# Altium PCB PCB1.PcbDoc (part 2 of 3)
Units mm, origin at the board's own origin, x right, y up, seen from the top; angles counter-clockwise.
Board outline 150.95 x 92.76 mm, 4 copper layers (Top Layer, GND, VCC, Bottom Layer); 250 components, 258 nets, 1099 pads, 538 vias.
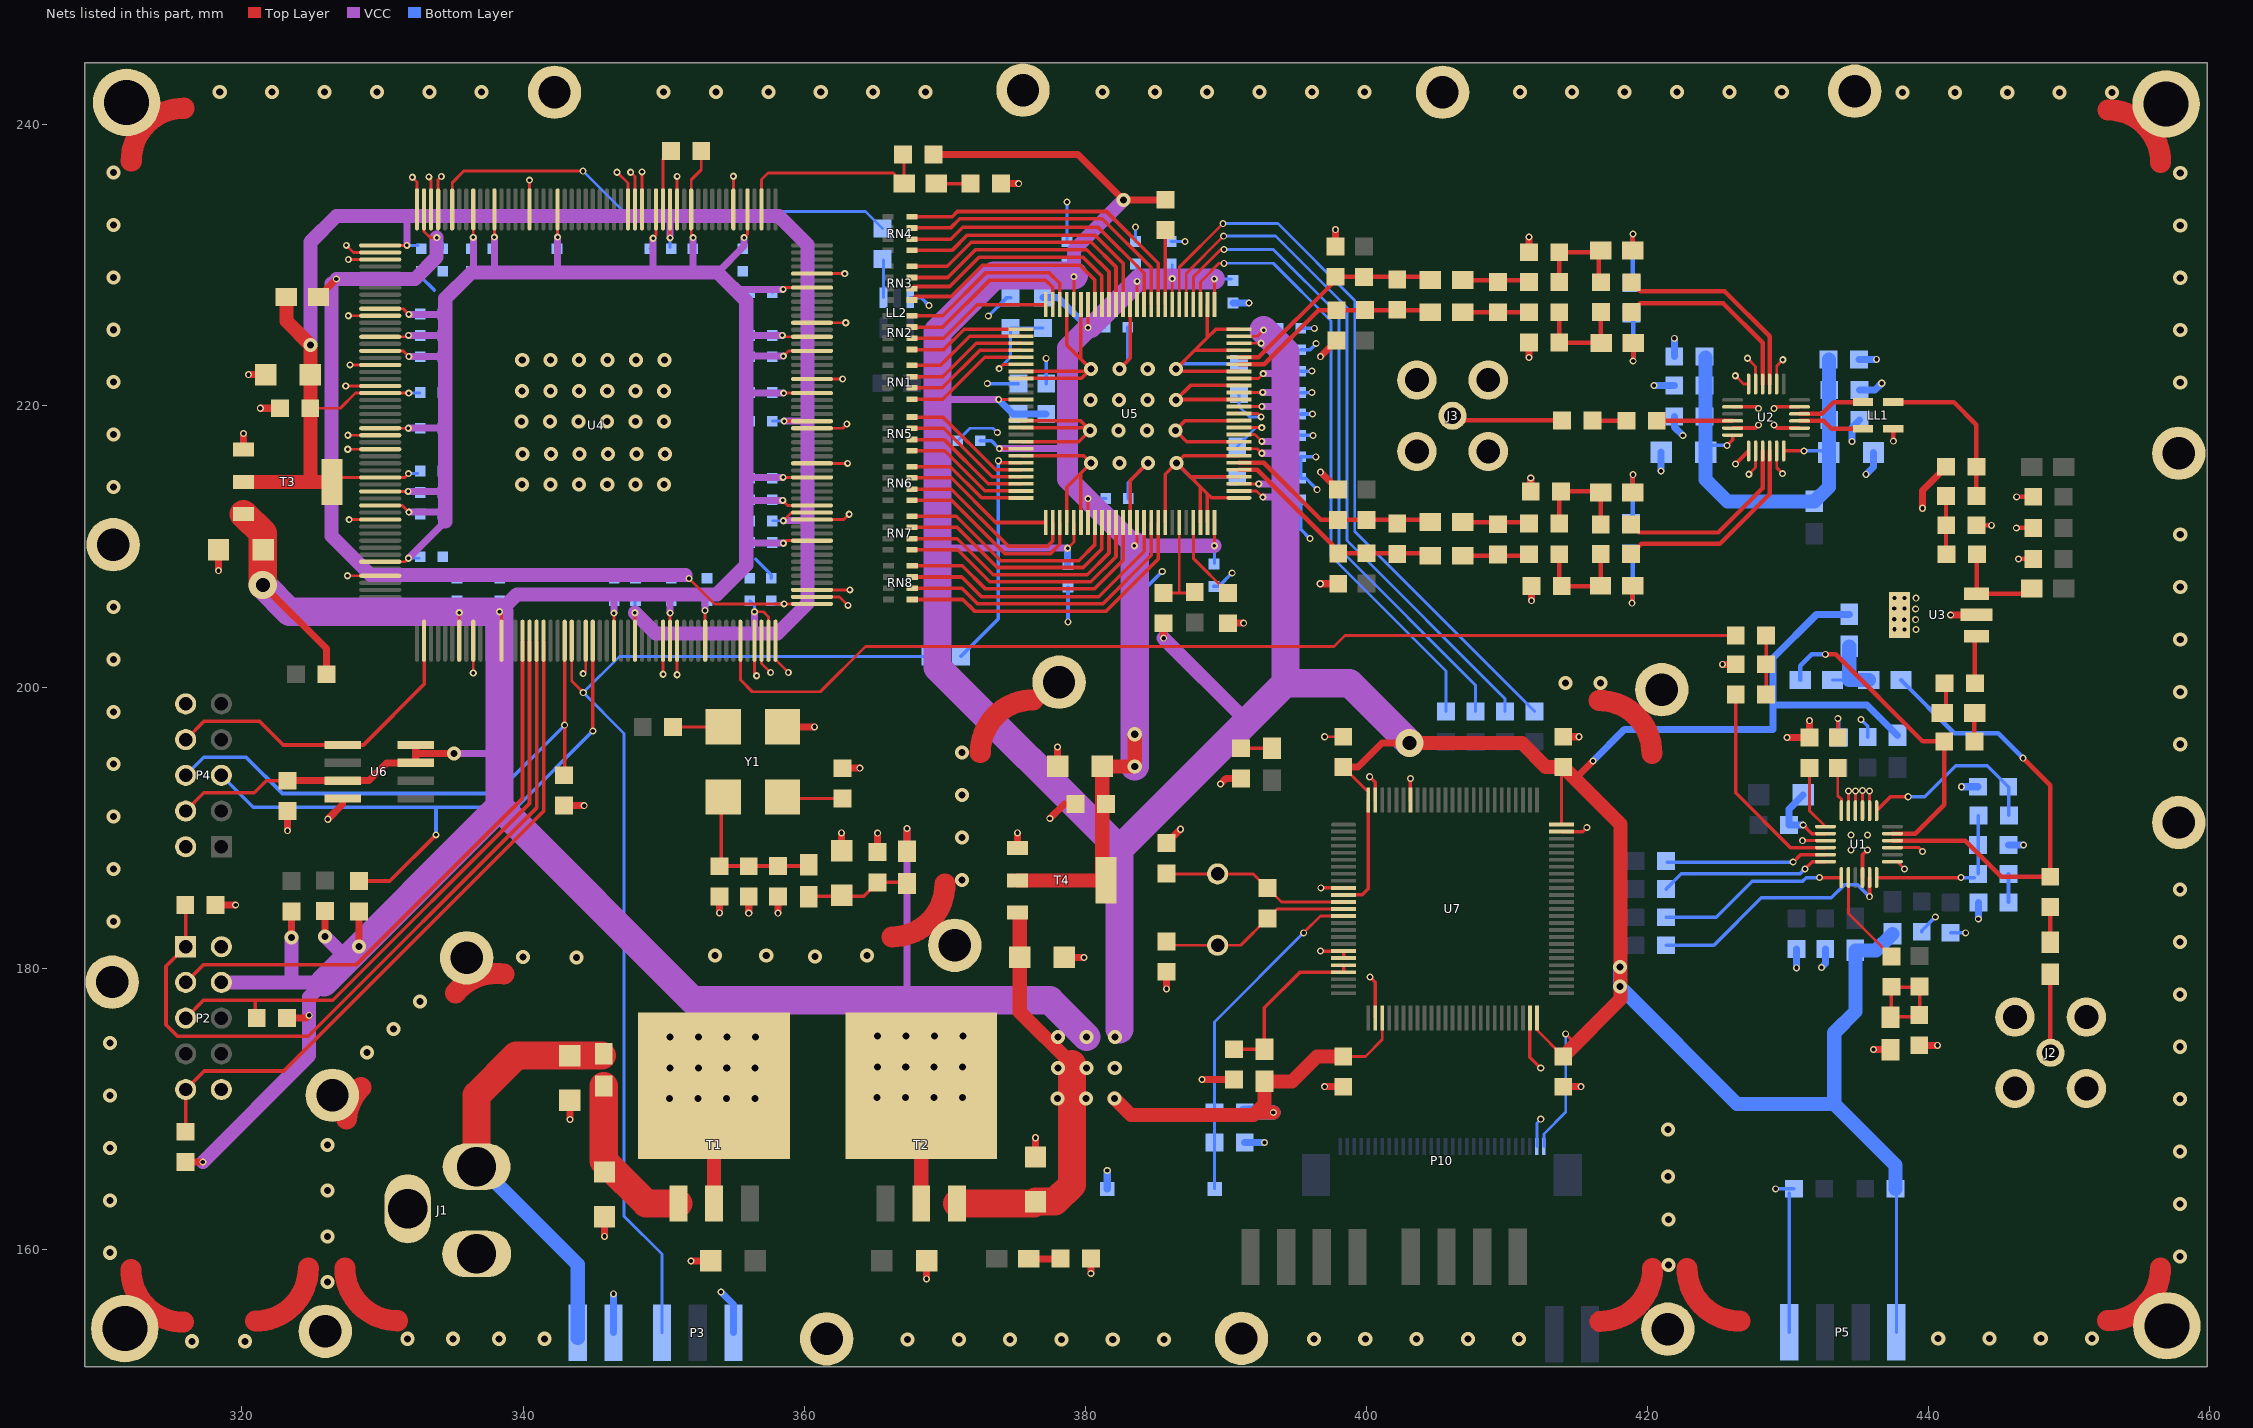
[diagram p4: the nets of this part, all layers, seen from the top]

## Via types
v1: diameter 0.5, hole 0.3, Top Layer to Bottom Layer, 224 vias
v2: diameter 1, hole 0.5, Top Layer to Bottom Layer, 206 vias
v3: diameter 0.508, hole 0.254, Top Layer to Bottom Layer, 97 vias
v4: diameter 0.5, hole 0.3, Top Layer to Bottom Layer, tented both sides, 7 vias
v5: diameter 2, hole 1, Top Layer to Bottom Layer, 4 vias

## Nets (pads, with @x,y where several pads share a name; then routed paths per layer and width w, separated by ;. In a path a pad name is that pad's centre, name@x,y a point inside that pad or via, vN(x,y) a via of type N, cw(c..) or ccw(c..) an arc to the next point about the centre after c; other vN are vias at no path point) (continued)
GND: C1.1 C2.2 C3.2 C7.2 C8.1 C10.2 C11.2 C13.2 C17.2 C18.2 C19.1 C20.1 C21.1 C22.1 C23.2 C24.1 C25.1 C27.1 C28.2 C29.2 C32.2 C34.2 C37.2 C38.2 C39.2 C40.1 C41.2 C42.1 C43.2 C44.2 C45.1 C46.2 C47.2 C48.1 C49.1 C50.2 C52.1 C53.1 C54.1 C55.1 C56.2 C57.2 C58.2 C59.2 C60.1 C61.2 C63.1 C64.2 C65.1 C66.2 C67.2 C68.2 C70.1 C71.2 C72.2 C73.2 C74.2 C75.2 C76.2 C77.2 C78.2 C80.1 C81.1 C82.1 C83.1 C84.1 C85.1 C86.1 C87.1 C88.1 C89.1 C90.1 C91.1 C92.1 C93.1 C94.1 C95.1 C96.1 C97.2 C100.2 C103.1 C104.1 C105.1 C106.1 C107.1 C108.1 C109.1 C110.1 C112.1 C113.1 C114.1 C115.1 C116.1 C117.1 C118.1 C119.1 C120.1 C121.1 C122.1 C123.1 C124.1 C125.1 C126.1 C127.1 C128.1 C129.1 C130.1 D1.2 J1.2 J1.3 J2.2 J2.3 J2.4 J2.5 J3.2 J3.3 J3.4 J3.5 K1.1 LL1.4 LL2.3 P1.1 P2.2 P2.10 P3.1 P4.2 P4.10 P5.1 P10.29 pad.0 R2.2 R4.2 R6.2 R8.2 R10.2 R11.2 R16.2 R22.2 R25.1 R31.2 R34.2 R35.2 R44.1 R48.2 R49.2 R55.1 R57.2 R60.1 R64.2 T1.2 T2.2 T3.1 T4.1 U1.1 U1.3 U1.8 U1.9 U1.10 U1.11 U1.15 U1.22 U2.2 U2.5 U2.8 U2.11 U2.12 U2.14 U2.17 U2.19 U2.20 U2.23 U3.2 U3.4 U4.9 U4.25 U4.36 U4.38 U4.49 U4.50 U4.52 U4.54 U4.55 U4.65 U4.73 U4.78 U4.85 U4.93 U4.100 U4.111 U4.119 U4.124 U4.125 U4.126 U4.140 U4.153 U4.154 U4.156 U4.158 U4.159 U4.167 U4.174 U4.177 U4.184 U4.186 U4.196 U4.204 U5.1 U5.4 U5.7 U5.9 U5.12 U5.15 U5.17 U5.19 U5.22 U5.25 U5.27 U5.38 U5.45 U5.47 U5.57 U5.58 U5.64 U5.65 U5.67 U5.69 U5.79 U5.81 U5.88 U5.93 U5.98 U5.99 U6.4 U7.10 U7.19 U7.20 U7.27 U7.49 U7.74 U7.94 U7.99 Y1.2 | length 510.6
  Top Layer w0.203: v3(327.387,221.419) U4.177@329.844,221.419 ; v3(327.431,231.419) 327.932,230.919 U4.158@329.844,230.919 ; v3(327.513,207.919) U4.204@329.844,207.919 ; v3(327.536,216.919) U4.186@329.844,216.919 ; v3(327.546,217.919) U4.184@329.844,217.919 ; v3(327.574,230.419) U4.159@329.844,230.419 ; v3(327.581,226.419) U4.167@329.844,226.419 ; v3(327.628,211.919) U4.196@329.844,211.919 ; v3(327.694,222.919) U4.174@329.844,222.919 ; v3(332.13,236.271) 332.461,235.94 U4.156@332.461,233.985 ; v3(333.299,236.296) 333.461,236.134 U4.154@333.461,233.985 ; U4.153@333.961,233.985 333.961,236.095 v3(334.188,236.322) ; v3(336.461,201.003) U4.9@336.461,203.302 ; U4.140@340.461,233.985 v3(340.461,236.067) ; v3(344.272,200.965) 344.461,201.155 U4.25@344.461,203.302 ; v3(346.685,236.626) 347.461,235.85 U4.126@347.461,233.985 ; v3(347.65,236.626) 347.961,236.315 U4.125@347.961,233.985 ; U4.124@348.461,233.985 v3(348.461,236.651) ; v3(349.961,200.914) U4.36@349.961,203.302 ; v3(350.961,200.879) U4.38@350.961,203.302 ; U4.119@350.961,233.985 v3(350.961,236.331) ; U4.111@354.961,233.985 v3(354.961,236.343) ; U4.49@356.461,203.302 356.461,200.967 v3(356.616,200.812) ; U4.50@356.961,203.302 356.961,201.686 v3(357.607,201.041) ; U4.52@357.961,203.302 357.961,201.956 v3(358.877,201.041) ; U4.54@360.553,206.419 362.516,206.419 v3(363.118,205.816) ; U4.55@360.553,206.919 v3(363.256,206.919) ; U4.65@360.553,211.919 362.82,211.919 v3@363.22,212.319 ; U4.73@360.553,215.919 v3(363.086,215.919) ; U4.78@360.553,218.419 362.741,218.419 v3(363.042,218.719) ; U4.85@360.553,221.919 v3(362.736,221.919) ; U4.93@360.553,225.919 v3(362.955,225.919) ; U4.100@360.553,229.419 v3(362.884,229.419) ; v1(397.027,196.469) C85.1@398.348,196.469 ; v3(426.237,222.148) 426.823,221.563 U2.12@427.178,221.563 ; v3(427.101,223.393) 427.678,222.816 U2.11@427.678,221.563 ; v3(427.203,215.138) 427.678,215.614 U2.20@427.678,216.801 ; U2.23@429.178,216.801 429.178,215.601 v3(429.59,215.189) ; U2.8@429.178,221.563 429.178,222.854 v3(429.616,223.291) ; v1(431.014,189.079) U1.15@432.651,189.079 ; U1.11@434.282,191.21 v1(434.282,192.601) ; U1.10@434.782,191.21 v1(434.782,192.619) ; U1.9@435.282,191.21 v1(435.282,192.636) ; U1.8@435.782,191.21 v1(435.782,192.603) ; U1.1@437.413,187.579 437.769,187.579 v1(438.277,187.071) ; U1.3@437.413,188.579 439.284,188.579 v1(439.547,188.316)
  Top Layer w0.254: U5.69@375.431,216.462 379.88,216.462 v2@380.543,215.798 ; U5.67@375.431,217.462 379.539,217.462 v2(380.34,218.262) ; U5.65@375.431,218.462 380.14,218.462 v2(380.34,218.262) ; U5.64@375.431,218.962 379.64,218.962 v2(380.34,218.262) ; U5.58@375.431,221.962 379.721,221.962 v2(380.39,222.631) ; U5.57@375.431,222.462 380.221,222.462 v2(380.39,222.631) ; U5.79@378.681,211.712 378.681,214.216 379.681,215.216 ; U5.47@378.681,227.212 378.681,224.34 v2(380.39,222.631) ; U5.81@379.681,211.712 379.681,215.216 ; U5.45@379.681,227.212 379.681,223.34 v2(380.39,222.631) ; v2(380.416,215.951) 379.681,215.216 ; v2(382.414,222.631) 383.181,223.398 U5.38@383.181,227.212 ; U5.88@383.181,211.712 383.181,214.669 v2(384.463,215.951) ; U5.93@385.681,211.712 385.681,215.146 v2(386.486,215.951) ; U5.98@388.181,211.712 388.181,214.256 ; U5.99@388.681,211.712 388.681,213.756 ; U5.27@388.681,227.212 388.681,224.851 ; U5.1@390.931,213.462 388.976,213.462 388.681,213.756 ; U5.4@390.931,214.962 387.476,214.962 ; U5.7@390.931,216.462 386.997,216.462 v2(386.486,215.951) ; U5.9@390.931,217.462 387.211,217.462 v2(386.41,218.262) 387.11,218.962 U5.12@390.931,218.962 ; U5.15@390.931,220.462 386.476,220.462 387.476,221.462 U5.17@390.931,221.462 ; U5.19@390.931,222.462 386.63,222.462 v2(386.461,222.631) 387.792,223.962 ; U5.22@390.931,223.962 387.792,223.962 ; U5.25@390.931,225.462 389.292,225.462 388.681,224.851 ; v1(396.731,181.221) U7.19@398.374,181.221 U7.20@398.374,180.721 ; v1(396.752,185.721) U7.10@398.374,185.721 ; v1@400.202,193.65 400.624,193.228 U7.99@400.624,191.971 ; v1(400.253,179.375) 400.624,179.004 U7.27@400.624,176.471 ; U7.94@403.124,191.971 v1(403.124,193.497) ; U7.49@411.624,176.471 411.624,173.669 v1(412.394,172.898) ; U7.74@413.874,189.721 415.374,189.721 v1(415.671,190.017) ; U2.17@426.047,218.432 427.677,218.432 v1(427.888,218.643) ; U2.14@426.047,219.932 v1@427.768,219.932 ; v1(426.252,215.875) U2.19@427.178,216.801 ; v1(428.981,218.643) 429.192,218.432 U2.2@430.809,218.432 ; v1(428.981,219.812) 429.101,219.932 U2.5@430.809,219.932 ; C11.2@433.527,196.418 v1(433.527,197.764) ; C11.2@433.857,196.545 C11.2@433.908,196.596 ; U1.22@435.282,186.448 435.282,188.064 v1(435.635,188.417) ; v2(386.486,215.951) 387.476,214.962 ; 387.476,214.962 388.181,214.256 ; 387.792,223.962 388.681,224.851 ; 388.181,214.256 388.681,213.756
  Top Layer w0.318: v1(437.472,217.492) LL1.4@437.472,218.379 ; R34.2@443.395,211.51 v1(444.453,211.51) ; v1(446.227,211.328) C54.1@447.434,211.328 ; v1(446.253,213.538) C53.1@447.434,213.538 ; v1(446.38,209.118) C55.1@447.434,209.118
  Top Layer w0.5: R44.1@318.135,184.506 v1(319.557,184.506) ; v1(318.338,208.28) C37.2@318.338,209.779 ; T3.1@320.116,216.891 v1(320.116,218.034) ; v1(320.472,222.225) C44.2@321.691,222.225 ; v1(321.31,219.837) C48.1@322.707,219.837 ; v1(323.24,189.789) C70.1@323.24,191.186 ; v1(326.111,190.602) 327.168,191.659 U6.4@327.168,192.075 ; R55.1@342.925,191.567 v1(344.348,191.567) ; v1(343.332,169.24) C2.2@343.332,170.612 ; v1(345.796,160.934) C7.2@345.796,162.331 ; v1(351.942,159.182) C23.2@353.339,159.182 ; v1(353.974,183.947) C13.2@353.974,185.102 ; v1(356.057,183.921) C10.2@356.057,185.102 ; v1(358.14,183.921) C8.1@358.14,185.115 ; Y1.2@358.445,197.176 v1(360.727,197.176) ; C3.2@362.661,188.366 v1(362.661,189.636) ; R22.2@362.737,194.234 v1(363.957,194.234) ; C1.1@365.227,188.265 v1(365.227,189.611) ; v1(368.706,157.912) C27.1@368.706,159.182 ; R60.1@373.99,235.814 v1(375.26,235.814) ; T4.1@375.183,188.544 v1(375.183,189.636) ; C34.2@376.453,166.573 v1(376.453,167.945) ; v1(377.469,190.652) 378.511,191.694 C52.1@379.298,191.694 ; C47.2@378.028,194.361 v1(378.028,195.732) ; C39.2@378.511,180.772 v1(379.908,180.772) ; v1(380.39,158.293) R25.1@380.39,159.36 ; v1(385.775,178.537) C93.1@385.775,179.756 ; C92.1@385.775,188.9 v1(386.766,189.89) ; v1(388.29,172.085) C100.2@390.576,172.085 ; v1(389.611,193.116) 389.992,193.497 R64.2@391.084,193.497 ; R49.2@390.144,204.546 v1(391.262,204.546) ; v1(396.71,207.353) R6.2@397.993,207.353 ; v1(396.723,223.507) R4.2@397.866,224.65 ; v1(396.735,215.29) R2.2@397.967,214.058 ; v1(397.027,171.577) C82.1@398.348,171.577 ; R8.2@397.789,231.356 v1(397.789,232.537) ; v1(411.556,223.444) C21.1@411.556,224.511 ; C22.1@411.556,230.937 v1(411.556,232.029) ; C19.1@411.683,213.919 v1(411.683,214.884) ; v1(411.734,206.146) C20.1@411.734,207.188 ; C83.1@413.995,171.577 v1(415.265,171.577) ; C84.1@413.995,196.469 v1(415.112,196.469) ; v1(425.323,201.625) R11.2@426.263,201.625 ; v1(429.92,196.418) R16.2@431.521,196.418 v1(431.521,197.612) ; v1(436.067,174.219) D1.2@437.286,174.219 ; R10.2@439.318,174.523 v1(440.614,174.523) ; v1(439.547,212.725) 439.547,213.995 R35.2@441.223,215.671 ; v1(441.555,205.132) U3.2@443.382,205.132
  Top Layer w1: T1.2@353.593,163.271 T1.2@353.593,171.653 ; T2.2@368.325,163.271 T2.2@368.325,171.653
  Top Layer w1.5: 312.109,158.577 ccw(c315.859,158.577) 315.859,154.827 ; 312.129,237.429 cw(c315.879,237.429) 315.879,241.179 ; 320.975,154.909 ccw(c320.975,158.659) 324.725,158.659 ; 327.324,158.679 ccw(c331.074,158.679) 331.074,154.928 ; 327.431,169.291 cw(c331.165,168.936) 328.459,171.532 ; 335.195,178.251 cw(c338.099,175.879) 338.635,179.59 ; 366.263,182.239 ccw(c366.263,185.989) 370.013,185.989 ; 372.526,195.335 cw(c376.276,195.335) 376.276,199.085 ; 416.55,199.046 cw(c416.55,195.296) 420.3,195.296 ; 416.606,154.883 ccw(c416.606,158.633) 420.356,158.633 ; 422.802,158.653 ccw(c426.552,158.653) 426.552,154.903 ; 452.725,154.934 ccw(c452.725,158.684) 456.475,158.684 ; 452.745,241.058 cw(c452.745,237.307) 456.495,237.307
  Bottom Layer w0.203: C77.2@370.916,217.526 371.805,218.415 373.431,218.415 v1(373.736,218.11) ; C68.2@378.689,231.673 v1(378.689,234.518) ; C74.2@383.565,231.699 v1(383.565,232.715) ; C71.2@386.105,231.699 v1(387.096,231.699) ; P10.29@412.12,167.31 412.12,168.991 v1(412.394,169.266)
  Bottom Layer w0.254: C94.1@332.765,229.591 332.765,229.159 333.68,228.244 ; 356.565,209.093 357.657,208.001 C95.1@357.657,207.747 ; LL2.3@367.548,227.704 368.332,227.704 v1(368.884,227.152) ; v1(373.024,221.59) C60.1@375.234,221.59 ; v1(373.101,226.39) 374.421,227.711 C80.1@374.675,227.711 ; C63.1@377.215,221.59 v1(377.215,223.393) ; v1(378.765,204.648) C109.1@378.765,207.112 ; v2(382.414,222.631) 383.007,223.224 C78.2@383.007,225.603 ; C76.2@383.057,213.411 383.057,214.545 v2(384.463,215.951) ; C75.2@383.565,207.162 384.404,207.162 v1(385.47,208.229) ; v2(386.461,222.631) 386.824,222.994 R48.2@390.931,222.994 ; v2(386.486,215.951) 387.476,214.962 C65.1@390.804,214.962 ; C73.2@389.153,207.162 389.484,207.162 v1(390.449,208.128) ; C107.1@395.326,213.335 395.326,211.226 v1(395.986,210.566) ; C64.2@395.326,217.907 v1(396.189,217.907) ; C61.2@395.326,219.431 v1(396.164,219.431) ; C59.2@395.326,220.955 v1(396.113,220.955) ; C58.2@395.326,222.479 v1(396.113,222.479) ; C57.2@395.326,224.003 395.986,224.003 v1(396.418,224.434) ; C56.2@395.326,225.527 v1(396.291,225.527) ; v1(396.392,216.383) C66.2@395.326,216.383 C67.2@395.326,214.859 395.681,214.859 v1(396.494,214.046) ; v1(429.108,164.313) R57.2@430.403,164.313 ; P5.1@430.073,154.102 R57.2@430.073,163.982 ; v1(433.527,197.764) 433.603,197.688 C29.2@433.603,196.418 ; v1(435.178,197.688) 435.661,197.206 C28.2@435.661,196.444 ; C24.1@439.496,182.601 439.496,182.677 v1(440.461,183.642) ; C25.1@441.554,182.524 v1(442.62,182.524)
  Bottom Layer w0.5: P1.1@346.431,154.076 v1(346.431,156.845) ; v1(354.076,156.972) 354.965,156.083 P3.1@354.965,154.076 ; K1.1@381.559,164.287 v1(381.559,165.608) ; C72.2@390.5,227.33 v1(391.643,227.33) ; C97.2@391.338,167.615 v1(392.735,167.615) ; v1(420.446,221.463) C43.2@421.894,221.463 ; v1(420.954,215.367) C50.2@420.954,216.713 ; C46.2@421.894,219.253 421.894,218.516 v1(422.504,217.907) ; C41.2@421.894,223.52 v1(421.894,224.815) ; v1(430.581,180.035) C17.2@430.581,181.381 ; v1(432.359,180.061) 432.638,180.34 C18.2@432.638,181.381 ; v1(434.543,217.475) 434.543,218.465 C45.1@435.077,218.999 ; C40.1@435.026,223.317 v1(436.27,223.317) ; C42.1@435.077,221.132 436.169,221.132 v1(436.651,221.615) ; v1(435.534,215.138) 436.067,215.671 C49.1@436.067,216.687 ; v1(442.316,192.913) C38.2@443.497,192.913 ; v1(443.522,183.502) R31.2@443.522,184.683 ; C32.2@445.668,188.779 v1(446.729,188.779)
  other v1: 434.467,188.417 434.467,189.484 435.635,189.484 400.228,193.624 438.277,204.089 439.09,204.089 437.566,204.114 438.252,204.8 439.064,204.8 437.54,204.826 439.064,205.562 437.54,205.588 438.277,205.588 439.09,206.324 437.566,206.35 438.277,206.35 427.888,219.812
  other v2: 316.459,153.467 320.218,153.467 367.36,153.594 371.008,153.594 374.655,153.594 378.303,153.594 381.95,153.594 385.597,153.594 396.265,153.619 399.913,153.619 403.56,153.619 407.208,153.619 410.855,153.619 331.775,153.645 335.026,153.645 338.277,153.645 341.528,153.645 440.67,153.67 444.317,153.67 447.965,153.67 451.612,153.67 326.085,157.683 421.488,158.902 457.86,159.512 310.617,159.766 326.085,160.934 421.488,162.128 457.86,163.239 310.617,163.493 326.085,164.186 421.462,165.176 457.86,166.965 310.617,167.219 326.085,167.437 421.462,168.529 457.86,170.692 350.418,170.739 352.442,170.739 354.465,170.739 356.489,170.739 365.176,170.815 367.199,170.815 369.223,170.815 371.246,170.815 310.617,170.946 350.444,172.898 352.467,172.898 354.491,172.898 356.514,172.898 365.201,172.974 367.225,172.974 369.248,172.974 371.272,172.974 328.905,174.015 457.86,174.418 310.617,174.672 350.469,175.108 352.493,175.108 354.516,175.108 356.54,175.108 365.227,175.184 367.25,175.184 369.274,175.184 371.297,175.184 330.784,175.692 332.664,177.648 457.86,178.145 343.814,180.772 340.004,180.797 360.756,180.848 353.67,180.899 357.302,180.899 364.465,180.924 457.86,181.871 310.871,183.337 457.86,185.598 371.221,186.284 310.871,187.064 371.221,189.306 310.871,190.79 371.221,192.329 310.871,194.517 371.221,195.351 457.886,195.936 310.871,198.243 457.886,199.662 414.147,200.279 416.636,200.304 310.871,201.97 457.886,203.389 310.871,205.696 457.886,207.115 457.886,210.842 310.871,214.242 339.92,214.427 341.943,214.427 343.967,214.427 345.99,214.427 348.014,214.427 350.037,214.427 382.439,215.951 339.971,216.586 341.994,216.586 344.018,216.586 346.041,216.586 348.065,216.586 350.088,216.586 310.871,217.968 382.363,218.262 384.387,218.262 339.894,218.897 341.918,218.897 343.941,218.897 345.965,218.897 347.988,218.897 350.012,218.897 380.365,220.421 382.389,220.421 384.412,220.421 386.436,220.421 339.92,221.056 341.943,221.056 343.967,221.056 345.99,221.056 348.014,221.056 350.037,221.056 457.886,221.666 310.871,221.695 384.437,222.631 339.945,223.266 341.969,223.266 343.992,223.266 346.016,223.266 348.039,223.266 350.063,223.266 457.886,225.392 310.871,225.421 457.886,229.119 310.871,229.148 457.886,232.845 310.871,232.874 457.886,236.572 310.871,236.601 438.128,242.291 441.855,242.291 445.581,242.291 449.308,242.291 453.034,242.291 318.425,242.341 322.152,242.341 325.878,242.341 329.605,242.341 333.331,242.341 337.058,242.341 349.997,242.341 353.724,242.341 357.451,242.341 361.177,242.341 364.904,242.341 368.63,242.341 381.214,242.341 384.941,242.341 388.667,242.341 392.394,242.341 396.12,242.341 399.847,242.341 410.907,242.341 414.633,242.341 418.36,242.341 422.086,242.341 425.813,242.341 429.539,242.341
  other v3: 363.195,212.293
IOUTA1: C6.1 L6.1 R7.2 R8.1 U5.21 | length 15.6
  Top Layer w0.318: U5.21@390.931,223.462 392.321,223.462 R8.1@397.789,228.93 ; R8.1@397.789,229.197 L6.1@404.304,229.197
IOUTA2: C6.2 L5.1 R3.2 R4.1 U5.20 | length 15.1
  Top Layer w0.318: U5.20@390.931,222.962 392.735,222.962 396.583,226.809 R4.1@397.866,226.809 L5.1@404.406,226.809
IOUTB1: C5.1 L4.1 R5.2 R6.1 U5.5 | length 15.8
  Top Layer w0.318: U5.5@390.931,215.462 392.233,215.462 R6.1@397.993,209.702 ; R6.1@397.993,209.512 L4.1@404.381,209.512
IOUTB2: C5.2 L3.1 R1.2 R2.1 U5.6 | length 15.1
  Top Layer w0.318: U5.6@390.931,215.962 392.699,215.962 396.761,211.899 R2.1@397.967,211.899 L3.1@404.381,211.899
LON: LL1.3 U2.3 | length 4.7
  Top Layer w0.318: U2.3@430.809,218.932 432.527,218.932 433.08,218.379 LL1.3@435.322,218.379
LOP: LL1.1 U2.4 | length 4.9
  Top Layer w0.318: U2.4@430.809,219.432 432.386,219.432 433.233,220.279 LL1.1@435.322,220.279
NCE: P4.6 R55.2 U4.22 | length 40.1
  Top Layer w0.254: R55.2@342.961,193.762 v4(342.961,197.292) U4.22@342.961,203.261
  Bottom Layer w0.254: P4.6@316.001,193.726 317.297,195.021 320.294,195.021 322.885,192.43 338.099,192.43 v4(342.961,197.292)
NCONFIG: P4.5 R39.1 U4.26 | length 44.7
  Top Layer w0.254: R39.1@328.32,186.207 330.53,186.207 v3(333.807,189.484) ; v4(344.961,196.879) U4.26@344.961,203.261
  Bottom Layer w0.254: P4.5@318.541,193.726 320.802,191.465 339.547,191.465 v4(344.961,196.879) ; v3(333.807,189.484) 333.807,191.364
NCS: P4.8 U4.2 U6.1 | length 23.1
  Top Layer w0.254: P4.8@316.001,196.266 317.322,197.587 321.234,197.587 322.936,195.885 U6.1@327.168,195.885 328.651,195.885 332.961,200.196 U4.2@332.961,203.261
NetC2_1: C2.1 J1.1 L1.1 P1.2 | length 30.5
  Top Layer w2: J1.1@336.697,165.887 336.697,170.967 339.517,173.787 C2.1@343.332,173.787 L1.1@345.618,173.787
  Bottom Layer w1.016: J1.1@336.575,165.71 337.109,165.71 343.891,158.928 P1.2@343.891,153.695
NetC4_2: C4.2 C9.2 R11.1 | length 4.2
  Top Layer w0.254: C9.2@428.422,199.466 R11.1@428.422,201.625 C4.2@428.422,203.683
NetC7_1: C7.1 L1.2 T1.1 | length 11.7
  Top Layer w2: 345.745,166.294 L1.2@345.745,171.628 ; C7.1@345.872,166.167 348.767,163.271 T1.1@351.053,163.271
NetC8_2: C8.2 C10.1 C13.1 L2.2 Y1.4 | length 11
  Top Layer w0.254: C13.1@353.987,187.274 C8.2@358.14,187.274 L2.2@360.223,187.274 ; C13.1@354.101,187.388 Y1.4@354.101,192.202
NetC9_1: C9.1 U1.16 | length 15
  Top Layer w0.254: C9.1@426.263,199.466 426.263,192.481 430.165,188.579 U1.16@432.651,188.579
NetC11_1: C11.1 U1.12 | length 3.2
  Top Layer w0.203: C11.1@433.527,194.259 433.527,192.278 433.782,192.023 U1.12@433.782,191.21
NetC12_2: C12.2 C14.2 U1.14 | length 5.4
  Top Layer w0.254: v1(431.063,190.195) 431.68,189.579 U1.14@432.651,189.579
  Bottom Layer w0.5: v1(431.063,190.195) C14.2@430.047,190.195 430.047,191.313 C12.2@431.063,192.329
NetC15_1: C15.1 L4.2 R19.2 | length 4.6
  Top Layer w0.318: L4.2@406.832,209.347 R19.2@411.455,209.347
NetC15_2: C15.2 L3.2 R18.2 | length 4.6
  Top Layer w0.318: L3.2@406.832,211.734 R18.2@411.455,211.734
NetC16_1: C16.1 L6.2 R21.2 | length 4.6
  Top Layer w0.318: L6.2@406.832,228.956 R21.2@411.429,228.956
NetC16_2: C16.2 L5.2 R20.2 | length 4.7
  Top Layer w0.318: L5.2@406.832,226.67 C16.2@409.346,226.67 R20.2@411.556,226.67
NetC19_2: C19.2 L7.2 R18.1 R28.2 | length 7.3
  Top Layer w0.318: R18.1@413.715,211.633 C19.2@413.715,213.792 ; C19.2@413.842,213.919 416.585,213.919 L7.2@416.662,213.843 R28.2@416.662,211.557
NetC20_2: C20.2 L8.1 R19.1 R29.2 | length 7.1
  Top Layer w0.318: C20.2@413.715,207.366 R19.1@413.715,209.448 ; C20.2@413.893,207.188 416.622,207.188 L8.1@416.648,207.213 R29.2@416.648,209.46
NetC21_2: C21.2 L9.2 R20.1 R26.2 | length 7.3
  Top Layer w0.318: R20.1@413.715,226.67 C21.2@413.715,224.511 L9.2@416.662,224.511 ; R26.2@416.662,226.67 L9.2@416.662,224.511 ; L9.2@416.687,224.485 L9.2@416.662,224.511
NetC22_2: C22.2 L10.1 R21.1 R27.2 | length 6.9
  Top Layer w0.318: R21.1@413.715,228.829 C22.2@413.715,230.937 416.535,230.937 R27.2@416.535,228.956
NetC26_2: C26.2 Y1.3 | length 3.6
  Top Layer w0.203: C26.2@350.672,197.155 Y1.3@354.223,197.155
NetC30_1: C30.1 L14.1 | length 1.9
  Top Layer w0.318: C30.1@443.23,196.164 L14.1@443.23,198.069
NetC30_2: C30.2 L13.1 U1.5 | length 23.2
  Top Layer w0.318: v1(432.638,202.336) 433.375,202.336 439.572,196.139 C30.2@441.096,196.139 441.096,191.643 439.032,189.579 U1.5@437.413,189.579
  Bottom Layer w0.318: L13.1@430.86,200.508 430.86,201.524 431.673,202.336 v1(432.638,202.336)
NetC31_1: C31.1 L15.1 | length 2.5
  Top Layer w0.318: L15.1@448.64,181.864 C31.1@448.64,184.353
NetC31_2: C31.2 L12.1 U1.4 | length 32.5
  Top Layer w0.318: U1.4@437.413,189.079 442.594,189.079 445.16,186.512 C31.2@448.64,186.512 448.64,193.015 v1(446.71,194.945)
  Bottom Layer w0.318: L12.1@438.023,200.508 441.808,196.723 444.932,196.723 v1(446.71,194.945)
NetC32_1: C32.1 C33.1 R32.1 U1.24 | length 11.1
  Top Layer w0.254: U1.24@436.282,186.448 v1(442.29,186.448)
  Bottom Layer w0.254: v1(442.29,186.448) C33.1@443.245,186.448 ; C33.1@443.509,186.712 R32.1@443.509,190.846
NetC33_2: C33.2 R31.1 | length 2
  Bottom Layer w0.254: R31.1@445.668,184.696 C33.2@445.668,186.712
NetC35_1: C35.1 L14.2 | length 1.7
  Top Layer w0.318: L14.2@441.223,198.222 C35.1@441.223,199.949
NetC35_2: C35.2 U3.1 | length 3.3
  Top Layer w0.318: C35.2@443.281,200.279 U3.1@443.281,203.53
NetC36_1: C36.1 R30.1 | length 2.4
  Top Layer w0.318: C36.1@416.103,218.948 R30.1@418.49,218.948
NetC38_1: C38.1 R32.2 U1.7 | length 13.4
  Top Layer w0.254: U1.7@436.282,191.21 437.274,192.202 v1(438.531,192.202)
  Bottom Layer w0.254: v1(438.531,192.202) 439.699,192.202 441.909,194.412 444.157,194.412 C38.1@445.656,192.913 445.694,192.875 R32.2@445.694,190.871
NetC40_2: C40.2 C41.1 C42.2 C43.1 C45.2 C46.1 C49.2 C50.1 L24.1 U2.18 U2.24 | length 32.6
  Top Layer w0.254: v1(425.653,217.195) 426.047,217.59 U2.18@426.047,217.932 ; U2.24@429.678,216.801 v1(431.128,216.801)
  Bottom Layer w0.254: C50.1@424.612,217.195 v1(425.653,217.195) ; v1(431.128,216.801) C49.2@432.779,216.801
  Bottom Layer w1: C41.1@424.129,223.444 C50.1@424.129,216.713 424.129,214.757 425.679,213.208 L24.1@431.851,213.208 432.892,214.249 C49.2@432.892,216.687 C40.2@432.892,223.291
NetC51_1: C51.1 R33.2 R34.1 | length 4.1
  Top Layer w0.318: C51.1@441.223,209.486 R33.2@441.223,213.584
NetC51_2: C51.2 L22.2 U3.3 | length 6.4
  Top Layer w0.318: U3.3@443.382,206.632 U3.3@443.421,206.632 ; C51.2@443.421,209.448 U3.3@443.421,206.632 ; L22.2@446.941,206.632 U3.3@443.421,206.632
NetC65_2: C65.2 U5.11 | length 3.9
  Top Layer w0.203: U5.11@390.931,218.462 v3(392.553,218.462)
  Bottom Layer w0.203: C65.2@390.804,217.121 392.145,218.462 v3(392.553,218.462)
NetC69_1: C69.1 LL2.1 | length 2.7
  Bottom Layer w0.203: LL2.1@365.648,227.704 C69.1@365.648,230.388
NetC69_2: C69.2 U4.151 | length 34.5
  Top Layer w0.203: U4.151@334.961,233.985 334.961,235.876 335.788,236.703 v1(344.272,236.703)
  Bottom Layer w0.203: v1(344.272,236.703) 347.142,233.832 364.363,233.832 C69.2@365.582,232.613
NetC80_2: C80.2 R54.2 U5.56 | length 7.2
  Top Layer w0.203: v3(373.863,222.656) 374.168,222.962 U5.56@375.431,222.962
  Bottom Layer w0.203: v3(373.863,222.656) 374.675,223.469 C80.2@374.675,225.552 R54.2@376.987,225.552
NetC92_2: C92.2 R62.2 U7.12 Y2.2 | length 13.4
  Top Layer w0.203: C92.2@385.801,186.715 Y2.2@389.407,186.715 391.947,186.715 R62.2@392.963,185.699 393.942,184.721 U7.12@398.374,184.721
NetC93_2: C93.2 R62.1 U7.13 Y2.1 | length 13.4
  Top Layer w0.203: C93.2@386.055,181.635 Y2.1@389.407,181.635 391.058,181.635 R62.1@392.963,183.54 393.644,184.221 U7.13@398.374,184.221
NetC100_1: C100.1 L25.2 U7.21 U7.22 | length 12.3
  Top Layer w0.254: C100.1@390.576,174.244 L25.2@392.735,174.244 392.735,177.19 395.265,179.721 U7.22@398.374,179.721 U7.21@398.374,180.221
NetD1_1: D1.1 R9.1 R10.1 R17.2 | length 8.4
  Top Layer w0.254: R17.2@437.185,178.664 R17.2@437.337,178.664 ; R17.2@437.337,178.689 R17.2@437.337,178.664 ; R17.2@437.337,178.664 439.293,178.664 R9.1@439.344,178.714 439.344,176.708 R10.1@439.318,176.682 439.191,176.555 437.337,176.555 R17.2@437.337,178.664
NetD2_2: D2.2 R25.2 | length 2.2
  Top Layer w0.5: D2.2@375.971,159.334 R25.2@378.206,159.334
NetD4_1: D4.1 R59.1 U4.107 | length 14.8
  Top Layer w0.203: U4.107@356.961,233.985 356.961,236.108 357.429,236.576 366.344,236.576 D4.1@367.106,235.814 R59.1@367.106,237.82
NetD4_2: D4.2 R60.2 | length 2.4
  Top Layer w0.254: D4.2@369.392,235.814 R60.2@371.831,235.814
NetD5_2: D5.2 R64.1 | length 2.2
  Top Layer w0.254: R64.1@391.084,195.656 D5.2@393.268,195.656
NetJ2_1: J2.1 L15.2 | length 5.6
  Top Layer w0.318: L15.2@448.64,179.578 448.64,174.015 J2.1@448.666,173.99
NetL7_1: L7.1 R23.1 | length 4.6
  Top Layer w0.318: L7.1@418.948,213.843 v1(418.948,215.113)
  Bottom Layer w0.318: R23.1@418.948,211.811 v1(418.948,215.113)
NetL8_2: L8.2 R23.2 | length 4.7
  Top Layer w0.318: v1(418.894,205.971) L8.2@418.894,207.213
  Bottom Layer w0.318: v1(418.894,205.971) R23.2@418.934,209.412
NetL9_1: L9.1 R24.1 | length 4.5
  Top Layer w0.318: v1(418.973,223.19) L9.1@418.973,224.485
  Bottom Layer w0.318: v1(418.973,223.19) R24.1@418.973,226.441
NetL10_2: L10.2 R24.2 | length 4.6
  Top Layer w0.318: L10.2@418.948,231.064 v1(418.948,232.232)
  Bottom Layer w0.318: R24.2@418.948,228.829 v1(418.948,232.232)
NetLL1_5: LL1.5 R33.1 R35.1 | length 11.7
  Top Layer w0.318: LL1.5@437.472,220.279 441.772,220.279 443.382,218.669 R35.1@443.382,215.671 R33.1@443.382,213.584
NetR12_1: R12.1 U1.17 | length 11.5
  Top Layer w0.254: v1(430.352,187.554) 430.878,188.079 U1.17@432.651,188.079
  Bottom Layer w0.254: R12.1@421.386,187.554 v1(430.352,187.554)
NetR13_1: R13.1 U1.18 | length 12.1
  Top Layer w0.254: v1(431.19,187.071) 431.698,187.579 U1.18@432.651,187.579
  Bottom Layer w0.254: R13.1@421.31,185.632 422.394,186.715 430.835,186.715 v1(431.19,187.071)
NetR14_1: R14.1 U1.19 | length 13.6
  Top Layer w0.254: v1(432.218,186.448) U1.19@433.782,186.448
  Bottom Layer w0.254: R14.1@421.31,183.634 424.883,183.634 427.431,186.182 431.013,186.182 431.279,186.448 v1(432.218,186.448)
NetR15_1: R15.1 U1.23 | length 17.9
  Top Layer w0.254: v1(435.782,185.095) U1.23@435.782,186.448
  Bottom Layer w0.254: R15.1@421.31,181.635 424.713,181.635 428.092,185.014 433.07,185.014 433.984,185.928 434.95,185.928 v1(435.782,185.095)
NetR16_1: R16.1 U1.13 | length 4.6
  Top Layer w0.203: R16.1@431.521,194.259 431.521,191.21 U1.13@432.651,190.079
NetR17_1: R17.1 U1.20 | length 6.9
  Top Layer w0.203: U1.20@434.282,186.448 434.282,183.903 R17.1@437.337,180.848
NetR22_1: R22.1 Y1.1 | length 4.2
  Top Layer w0.203: Y1.1@358.546,192.075 R22.1@362.737,192.075
NetR26_1: R26.1 U2.10 | length 13.7
  Top Layer w0.318: R26.1@418.846,226.695 419.466,227.315 425.364,227.315 428.178,224.5 U2.10@428.178,221.563
NetR27_1: R27.1 U2.9 | length 14.8
  Top Layer w0.318: R27.1@418.846,228.803 419.479,228.171 425.473,228.171 428.678,224.965 U2.9@428.678,221.563
NetR28_1: R28.1 U2.21 | length 13.5
  Top Layer w0.318: R28.1@418.821,211.557 419.377,211 425.021,211 428.178,214.158 U2.21@428.178,216.801
NetR29_1: R29.1 U2.22 | length 14.7
  Top Layer w0.318: R29.1@418.821,209.474 419.534,210.187 425.122,210.187 428.678,213.744 U2.22@428.678,216.801
NetR30_2: R30.2 U2.16 | length 5.4
  Top Layer w0.318: R30.2@420.665,218.932 U2.16@426.047,218.932
NetR46_1: R46.1 U5.28 | length 44.3
  Top Layer w0.203: U5.28@388.181,227.212 388.181,228.822 389.509,230.149 v1(389.865,230.149)
  Bottom Layer w0.203: v1(389.865,230.149) 393.37,230.149 397.485,226.035 397.485,209.321 405.663,201.143 R46.1@405.663,198.267
NetR47_1: R47.1 U5.29 | length 47.3
  Top Layer w0.203: U5.29@387.681,227.212 387.681,229.185 389.636,231.14 v1(389.865,231.14)
  Bottom Layer w0.203: v1(389.865,231.14) 393.37,231.14 398.043,226.466 398.043,209.855 407.763,200.135 R47.1@407.763,198.267
NetR48_1: R48.1 U5.13 | length 4.4
  Top Layer w0.203: U5.13@390.931,219.462 392.272,219.462 v3(392.506,219.227)
  Bottom Layer w0.203: R48.1@390.931,220.835 390.931,219.962 391.666,219.227 v3(392.506,219.227)
NetR49_1: R49.1 U5.97 | length 6
  Top Layer w0.203: U5.97@387.681,211.712 387.681,209.168 R49.1@390.144,206.705
NetR50_1: R50.1 U5.33 | length 5.3
  Top Layer w0.254: U5.33@385.681,227.212 385.681,232.494 R50.1@385.699,232.512
NetR51_2: R51.2 U5.70 | length 16.7
  Top Layer w0.254: v1(373.812,216.103) 373.953,215.962 U5.70@375.431,215.962
  Bottom Layer w0.254: R51.2@371.145,202.184 373.812,204.851 v1(373.812,216.103)
NetR52_2: R52.2 U5.30 | length 50.2
  Top Layer w0.203: U5.30@387.181,227.212 387.181,229.422 v1(389.839,232.08)
  Bottom Layer w0.203: v1(389.839,232.08) 393.522,232.08 398.602,227 398.602,210.439 409.863,199.178 R52.2@409.863,198.272
NetR53_2: R53.2 U5.31 | length 53.2
  Top Layer w0.203: U5.31@386.681,227.212 386.681,229.862 v1(389.788,232.969)
  Bottom Layer w0.203: v1(389.788,232.969) 393.7,232.969 399.161,227.508 399.161,211.074 R53.2@411.963,198.272
NetRN1_5: RN1.5 U5.52 | length 8.6
  Top Layer w0.254: RN1.5@367.663,222.888 369.7,222.888 371.774,224.962 U5.52@375.431,224.962
NetRN1_6: RN1.6 U5.53 | length 8.8
  Top Layer w0.254: RN1.6@367.663,222.088 369.866,222.088 372.239,224.462 U5.53@375.431,224.462
NetRN1_7: RN1.7 U5.54 | length 8.9
  Top Layer w0.254: RN1.7@367.663,221.288 369.828,221.288 372.501,223.962 U5.54@375.431,223.962
NetRN1_8: RN1.8 U5.55 | length 9
  Top Layer w0.254: RN1.8@367.663,220.488 369.866,220.488 372.839,223.462 U5.55@375.431,223.462
NetRN2_5: RN2.5 U5.48 | length 13.6
  Top Layer w0.254: RN2.5@367.663,226.414 369.847,226.414 372.897,229.464 377.444,229.464 378.181,228.726 U5.48@378.181,227.212
NetRN2_6: RN2.6 U5.49 | length 12.8
  Top Layer w0.254: RN2.6@367.663,225.614 369.86,225.614 373.177,228.93 377.19,228.93 377.681,228.439 U5.49@377.681,227.212
NetRN2_7: RN2.7 U5.50 | length 10.5
  Top Layer w0.254: RN2.7@367.663,224.814 369.924,224.814 372.322,227.212 U5.50@377.181,227.212
NetRN2_8: RN2.8 U5.51 | length 8.4
  Top Layer w0.254: RN2.8@367.663,224.014 369.937,224.014 371.385,225.462 U5.51@375.431,225.462
NetRN3_5: RN3.5 U5.40 | length 18.6
  Top Layer w0.254: RN3.5@367.663,229.939 370.172,229.939 371.881,231.648 380.416,231.648 382.181,229.882 U5.40@382.181,227.212
NetRN3_6: RN3.6 U5.41 | length 17.8
  Top Layer w0.254: RN3.6@367.663,229.139 370.21,229.139 372.186,231.115 380.111,231.115 381.681,229.544 U5.41@381.681,227.212
NetRN3_7: RN3.7 U5.42 | length 17
  Top Layer w0.254: RN3.7@367.663,228.339 367.823,228.498 370.357,228.498 372.44,230.581 379.832,230.581 381.181,229.231 U5.42@381.181,227.212
NetRN3_8: RN3.8 U5.43 | length 16.2
  Top Layer w0.254: RN3.8@367.663,227.539 367.912,227.787 370.459,227.787 372.694,230.022 379.603,230.022 380.681,228.944 U5.43@380.681,227.212
NetRN4_5: RN4.5 U5.34 | length 22.1
  Top Layer w0.254: RN4.5@367.663,233.464 370.522,233.464 370.891,233.832 381.508,233.832 385.181,230.159 U5.34@385.181,227.212
NetRN4_6: RN4.6 U5.35 | length 21.4
  Top Layer w0.254: RN4.6@367.663,232.664 370.408,232.664 371.069,233.324 381.203,233.324 384.681,229.846 U5.35@384.681,227.212
NetRN4_7: RN4.7 U5.36 | length 20.5
  Top Layer w0.254: RN4.7@367.663,231.864 370.421,231.864 371.272,232.715 380.898,232.715 384.181,229.432 U5.36@384.181,227.212
NetRN4_8: RN4.8 U5.39 | length 19.2
  Top Layer w0.254: RN4.8@367.663,231.064 370.51,231.064 371.602,232.156 380.67,232.156 382.681,230.144 U5.39@382.681,227.212
NetRN5_1: RN5.1 U5.71 | length 9.3
  Top Layer w0.254: RN5.1@367.663,219.211 369.866,219.211 373.615,215.462 U5.71@375.431,215.462
NetRN5_2: RN5.2 U5.72 | length 9.2
  Top Layer w0.254: RN5.2@367.663,218.411 369.929,218.411 373.379,214.962 U5.72@375.431,214.962
NetRN5_3: RN5.3 U5.73 | length 9.1
  Top Layer w0.254: RN5.3@367.663,217.611 369.942,217.611 373.091,214.462 U5.73@375.431,214.462
NetRN5_4: RN5.4 U5.74 | length 8.9
  Top Layer w0.254: RN5.4@367.663,216.811 370.005,216.811 372.855,213.962 U5.74@375.431,213.962
NetRN6_1: RN6.1 U5.75 | length 8.7
  Top Layer w0.254: RN6.1@367.663,215.686 370.394,215.686 372.618,213.462 U5.75@375.431,213.462
NetRN6_2: RN6.2 U5.76 | length 10.8
  Top Layer w0.254: RN6.2@367.663,214.886 370.457,214.886 373.631,211.712 U5.76@377.181,211.712
NetRN6_3: RN6.3 U5.77 | length 13.2
  Top Layer w0.254: RN6.3@367.663,214.086 370.47,214.086 374.523,210.033 377.317,210.033 377.681,210.397 U5.77@377.681,211.712
NetRN6_4: RN6.4 U5.78 | length 13.9
  Top Layer w0.254: RN6.4@367.663,213.286 370.483,213.286 374.269,209.499 377.52,209.499 378.181,210.16 U5.78@378.181,211.712
NetRN7_1: RN7.1 U5.83 | length 16.4
  Top Layer w0.254: RN7.1@367.663,212.161 370.82,212.161 373.99,208.991 379.527,208.991 380.681,210.146 U5.83@380.681,211.712
NetRN7_2: RN7.2 U5.84 | length 17.1
  Top Layer w0.254: RN7.2@367.663,211.361 370.884,211.361 373.736,208.509 379.857,208.509 381.181,209.833 U5.84@381.181,211.712
NetRN7_3: RN7.3 U5.85 | length 17.9
  Top Layer w0.254: RN7.3@367.663,210.561 370.896,210.561 373.456,208.001 380.136,208.001 381.681,209.546 U5.85@381.681,211.712
NetRN7_4: RN7.4 U5.86 | length 18.6
  Top Layer w0.254: RN7.4@367.663,209.761 370.934,209.761 373.202,207.493 380.39,207.493 382.181,209.284 U5.86@382.181,211.712
NetRN8_1: RN8.1 U5.87 | length 19.2
  Top Layer w0.254: RN8.1@367.663,208.635 371.247,208.635 372.897,206.985 380.644,206.985 382.681,209.022 U5.87@382.681,211.712
NetRN8_2: RN8.2 U5.90 | length 20.5
  Top Layer w0.254: RN8.2@367.663,207.835 371.208,207.835 372.618,206.426 380.949,206.426 384.181,209.658 U5.90@384.181,211.712
NetRN8_3: RN8.3 U5.91 | length 21.3
  Top Layer w0.254: RN8.3@367.663,207.035 371.221,207.035 372.339,205.918 381.229,205.918 384.681,209.371 U5.91@384.681,211.712
NetRN8_4: RN8.4 U5.92 | length 22
  Top Layer w0.254: RN8.4@367.663,206.235 371.284,206.235 372.11,205.41 381.483,205.41 385.181,209.109 U5.92@385.181,211.712
NRST: C97.1 K1.2 R61.1 U7.14 | length 24.2
  Top Layer w0.203: v1(395.529,182.524) 396.725,183.721 U7.14@398.374,183.721
  Bottom Layer w0.203: K1.2@389.179,164.313 C97.1@389.179,167.615 R61.1@389.179,169.748 389.179,176.174 v1(395.529,182.524)
NSTATUS: R40.1 U4.121 | length 4.4
  Top Layer w0.203: U4.121@349.961,233.985 349.961,237.566 R40.1@350.52,238.125
PLL_LOCK: P3.3 R51.1 U4.23 | length 77.7
  Top Layer w0.203: U4.23@343.461,203.302 343.461,200.429 v1(344.284,199.606)
  Bottom Layer w0.203: P3.3@349.885,154.076 349.885,159.664 347.193,162.357 347.193,196.698 v1(344.284,199.606) 346.862,202.184 R51.1@368.986,202.184
REF_4360: C4.1 U4.47 | length 75.6
  Top Layer w0.203: U4.47@355.461,203.302 355.461,200.519 356.311,199.669 361.137,199.669 364.363,202.895 397.688,202.895 398.475,203.683 C4.1@426.263,203.683
RESET: R45.1 R63.2 U5.95 | length 7.1
  Top Layer w0.203: R45.1@385.572,206.705 R63.2@387.731,206.705 ; 386.681,206.735 U5.95@386.681,211.712
RF_OUT: C36.2 J3.1 | length 7.5
  Top Layer w0.318: J3.1@406.451,218.973 C36.2@413.918,218.973
TCK: P2.1 R44.2 U4.18 | length 54.4
  Top Layer w0.254: R44.2@316.001,184.48 P2.1@316.001,181.534 314.604,180.137 314.604,175.971 315.417,175.158 324.714,175.158 340.961,191.406 U4.18@340.961,203.261
TDI: P2.9 R41.2 U4.19 | length 48.7
  Top Layer w0.254: R41.2@316.001,168.377 P2.9@316.001,171.374 317.322,172.695 322.986,172.695 341.461,191.17 U4.19@341.461,203.261
TDO: P2.3 U4.16 | length 40.6
  Top Layer w0.254: P2.3@316.001,178.994 317.246,180.238 328.117,180.238 339.961,192.083 U4.16@339.961,203.261
TMS: P2.5 R43.1 U4.17 | length 43.5
  Top Layer w0.254: P2.5@316.001,176.454 317.271,177.724 320.954,177.724 ; R43.1@320.954,176.555 320.954,177.724 ; U4.17@340.461,203.261 340.461,191.719 326.466,177.724 320.954,177.724
VCC1_2: C44.1 C48.2 C81.2 C86.2 C87.2 C88.2 C89.2 C90.2 C91.2 C94.2 L23.1 T3.2 U4.32 U4.51 U4.66 U4.79 U4.120 U4.157 U4.178 U4.190 | length 144
  Top Layer w0.203: C48.2@324.866,219.837 327,219.837 328.081,220.919 U4.178@329.844,220.919 v3(331.866,220.919) ; T3.2@326.73,214.919 U4.190@329.844,214.919 331.581,214.919 v3(331.851,215.189) ; U4.157@329.844,231.419 v3(331.737,231.419) ; U4.32@347.961,203.302 v3(347.961,205.29) ; v3(350.461,231.961) U4.120@350.461,233.985 ; v3(356.464,205.359) 357.099,205.359 357.461,204.996 U4.51@357.461,203.302 ; v3(358.521,211.836) 359.104,212.419 U4.66@360.553,212.419 ; v3(358.568,218.919) U4.79@360.553,218.919
  Top Layer w1: T3.2@320.116,214.605 T3.2@326.416,214.605 ; L23.1@323.164,227.762 323.164,226.035 v2(324.866,224.333) C44.1@324.866,222.225 C48.2@324.866,219.837 324.866,214.63
  VCC w0.5: v3(331.737,231.419) 331.737,233.464 ; v3(350.461,231.961) 350.461,233.502 ; 356.464,203.86 v3(356.464,205.359) ; v3(358.521,211.836) 360.172,211.836 ; v3(358.568,218.919) 360.193,218.919
  VCC w1: v2(324.866,224.333) 324.866,231.648 326.72,233.502 350.461,233.502 358.191,233.502 360.223,231.47 360.223,205.939 358.094,203.81 349.441,203.81 v3(347.961,205.29)
  Bottom Layer w0.203: v3(331.737,231.419) C94.2@332.538,231.419 ; v3(331.851,215.189) C90.2@332.511,215.189 ; v3(331.866,220.919) C91.2@332.653,220.919 ; v3(347.961,205.29) C89.2@347.961,206.102 ; C81.2@350.461,231.275 v3(350.461,231.961) ; C88.2@356.133,206.146 356.464,205.816 v3(356.464,205.359) ; C86.2@357.738,218.919 v3(358.568,218.919) ; C87.2@357.759,211.836 v3(358.521,211.836)
VCC1_2_PLL: C95.2 C96.2 L23.2 U4.53 U4.155 | length 69.9
  Top Layer w0.203: U4.155@332.961,233.985 332.961,232.417 333.4,231.978 v3(333.858,231.978) ; v1(351.815,207.721) 353.619,205.918 v3(358.572,205.918) U4.53@360.553,205.918
  Top Layer w0.5: L23.2@325.45,227.762 v1(326.72,229.032)
  VCC w0.5: 326.39,228.702 v1(326.72,229.032) ; 351.561,207.975 v1(351.815,207.721)
  VCC w1: 326.39,228.702 326.39,210.744 329.159,207.975 351.561,207.975 ; v1(326.72,229.032) 332.308,229.032 333.858,230.581 v3(333.858,231.978)
  Bottom Layer w0.203: v3(333.858,231.978) 334.289,231.546 C96.2@334.289,231.191 ; C95.2@357.886,205.918 v3(358.572,205.918)
VCC1_8: C47.1 C52.2 C71.1 C72.1 C73.1 C74.1 C75.1 C76.1 C77.1 C78.1 R54.1 T4.2 U5.26 U5.32 U5.37 U5.44 U5.68 U5.82 U5.89 U5.100 | length 101.2
  Top Layer w0.203: v3(373.883,216.962) U5.68@375.431,216.962 ; U5.82@380.181,211.712 v3@380.181,213.405 ; v3@380.181,225.583 U5.44@380.181,227.212 ; v3(383.489,210.058) 383.681,210.25 U5.89@383.681,211.712 ; U5.37@383.681,227.212 v3(383.681,228.865) ; U5.32@386.181,227.212 v3(386.181,229.057) ; v3(389.181,210.055) U5.100@389.181,211.712 ; U5.26@389.181,227.212 v3(389.181,229.034)
  Top Layer w1: T4.2@375.183,186.258 T4.2@381.483,186.258 381.203,186.538 C47.1@381.203,194.361 v2(383.515,194.361) v2(383.515,196.647)
  VCC w0.5: v3(373.883,216.962) 378.765,216.962 ; v3(383.681,228.865) v3@383.851,229.034
  VCC w1: v3@383.492,210.055 v3(389.181,210.055)
  VCC w1.5: v3(380.187,225.577) 378.739,224.13 378.739,214.808 v3(383.489,210.058) ; v3@380.394,225.577 v3(383.681,228.865) ; v3@383.851,229.034 v3(389.181,229.034)
  VCC w2: v2(383.515,194.361) v3@383.515,210.033
  Bottom Layer w0.203: v3(380.187,213.411) C76.1@381.457,213.411 ; v3(380.187,225.577) C78.1@381.381,225.577 ; C75.1@383.489,208.839 v3(383.489,210.058) ; v3(383.681,228.865) C74.1@383.681,229.983 ; v3(386.181,229.057) C71.1@386.181,230.023 ; C73.1@389.181,208.791 v3(389.181,210.055) ; v3(389.181,229.034) C72.1@390.395,229.034
  Bottom Layer w0.254: C77.1@372.516,217.526 373.319,217.526 v3(373.883,216.962)
  Bottom Layer w0.5: R54.1@376.987,227.711 378.054,227.711 v3(380.187,225.577)
VCC3_3: C34.1 C37.1 C39.1 C56.1 C57.1 C58.1 C59.1 C60.2 C61.1 C63.2 C64.1 C66.1 C67.1 C68.1 C70.2 C82.2 C83.2 C84.2 C85.2 C103.2 C104.2 C105.2 C106.2 C107.2 C108.2 C109.2 C110.2 C112.2 C113.2 C114.2 C115.2 C116.2 C117.2 C118.2 C119.2 C120.2 C121.2 C122.2 C123.2 C124.2 C125.2 C126.2 C127.2 C128.2 C129.2 C130.2 L17.1 L18.1 L19.1 L20.1 L21.1 L25.1 P2.4 P4.4 P5.4 P10.30 R36.2 R37.2 R38.2 R39.2 R40.2 R41.1 R43.2 R45.2 R50.2 R58.1 R59.2 R61.2 T2.3 T3.3 T4.3 U4.7 U4.13 U4.29 U4.37 U4.42 U4.62 U4.67 U4.71 U4.83 U4.89 U4.91 U4.98 U4.109 U4.117 U4.122 U4.136 U4.145 U4.148 U4.166 U4.170 U4.172 U4.183 U4.192 U4.194 U4.202 U5.2 U5.3 U5.8 U5.10 U5.14 U5.16 U5.18 U5.23 U5.24 U5.46 U5.61 U5.80 U6.3 U6.7 U6.8 U7.11 U7.28 U7.50 U7.75 U7.100 | length 830.1
  Top Layer w0.203: U4.202@329.844,208.919 331.601,208.919 v3(331.851,209.169) ; U4.194@329.844,212.919 331.403,212.919 v3(331.876,212.446) ; U4.192@329.844,213.919 v3(331.825,213.919) ; U4.183@329.844,218.419 v3(331.847,218.419) ; U4.172@329.844,223.919 331.478,223.919 v3(331.876,223.52) ; U4.170@329.844,224.919 331.751,224.919 v3(331.851,225.019) ; U4.166@329.844,226.919 331.475,226.919 v3(331.876,226.517) ; U4.7@335.461,203.302 v3(335.461,205.305) ; v3(336.461,231.991) U4.148@336.461,233.985 ; v3(337.961,232.015) U4.145@337.961,233.985 ; v3(338.328,205.359) 338.461,205.226 U4.13@338.461,203.302 ; v3(342.461,232.01) U4.136@342.461,233.985 ; U4.29@346.461,203.302 v3(346.461,205.263) ; v3(349.25,231.927) 349.461,232.139 U4.122@349.461,233.985 ; U4.37@350.461,203.302 v3(350.461,205.275) ; v3(352.095,231.978) 351.961,232.112 U4.117@351.961,233.985 351.961,236.087 352.679,236.804 R40.2@352.679,238.125 ; v1(352.939,205.443) U4.42@352.961,203.302 ; v3(355.727,231.978) 355.961,232.213 U4.109@355.961,233.985 ; v3(358.445,225.019) 358.545,224.919 U4.91@360.553,224.919 ; v3(358.47,213.284) 358.835,212.919 U4.67@360.553,212.919 ; v3(358.496,228.295) 358.619,228.419 U4.98@360.553,228.419 ; v3(358.505,214.919) U4.71@360.553,214.919 ; v3(358.521,210.236) 358.704,210.419 U4.62@360.553,210.419 ; v3(358.521,223.545) 358.894,223.919 U4.89@360.553,223.919 ; v3(358.532,220.919) U4.83@360.553,220.919 ; v3(373.827,220.462) U5.61@375.431,220.462 ; v3(378.739,209.88) 379.181,210.322 U5.80@379.181,211.712 ; U5.46@379.181,227.212 v3(379.181,229.199) ; U5.2@390.931,213.962 392.184,213.962 v3(392.633,213.512) ; U5.3@390.931,214.462 v3(392.338,214.462) ; U5.8@390.931,216.962 392.232,216.962 v3(392.557,216.637) ; U5.10@390.931,217.962 392.07,217.962 v3(392.557,217.475) ; U5.14@390.931,219.962 v3(392.559,219.962) ; U5.16@390.931,220.962 v3(392.615,220.962) ; U5.18@390.931,221.962 392.319,221.962 v3(392.659,222.301) ; U5.23@390.931,224.462 v3(392.504,224.462) ; U5.24@390.931,224.962 392.246,224.962 v3(392.684,225.4) ; C82.2@398.348,173.736 399.923,173.736 401.124,174.937 U7.28@401.124,176.471 ; C85.2@398.348,194.31 400.124,192.535 U7.100@400.124,191.971 ; U7.50@412.124,176.471 412.124,175.607 C83.2@413.995,173.736 ; U7.75@413.874,190.221 C84.2@413.874,194.189 ; v1(414.172,175.336) 414.845,174.663
  Top Layer w0.254: P4.4@316.001,191.186 317.297,192.481 320.878,192.481 321.742,193.345 C70.2@323.24,193.345 ; U7.11@398.374,185.221 399.698,185.221 400.124,185.646 U7.100@400.124,191.971
  Top Layer w0.5: R41.1@316.001,166.218 v1(317.221,166.218) ; v5(321.488,207.264) 326.009,202.743 R36.2@326.009,200.914 ; R43.2@323.215,176.454 324.587,176.454 v1(324.79,176.657) ; C70.2@323.24,193.345 U6.3@327.168,193.345 329.032,193.345 330.302,194.615 U6.7@332.368,194.615 332.368,195.275 ; v2(323.52,182.194) R38.2@323.52,184.048 ; v2(325.907,182.27) R37.2@325.907,184.074 ; v2(328.32,181.559) R39.2@328.32,184.048 ; U6.8@332.368,195.885 332.368,195.275 ; v2(335.102,195.275) 332.368,195.275 ; L18.1@367.309,188.316 v1(367.309,189.941) ; R59.2@369.189,237.896 379.476,237.896 v2(382.727,234.645) R50.2@385.674,234.645 ; v1(385.572,203.479) R45.2@385.572,204.546 ; C85.2@398.348,194.31 399.39,194.31 401.091,196.012 v5(403.047,196.012) ; 414.871,193.51 v1(416.103,194.742)
  Top Layer w1: T4.3@375.336,183.82 C39.1@375.336,180.772 375.336,176.886 379.044,173.177 ; v2(382.067,170.739) 383.235,169.57 391.947,169.57 392.125,169.748 ; v1(393.37,169.748) 392.125,169.748 ; C82.2@398.348,173.736 396.469,173.736 394.691,171.958 L25.1@392.735,171.958 392.735,170.358 392.125,169.748 ; v5(403.047,196.012) 411.048,196.012 412.75,194.31 C84.2@413.995,194.31 418.059,190.246 418.059,177.8 C83.2@413.995,173.736
  Top Layer w2: T3.3@320.116,212.319 321.488,210.947 v5(321.488,207.264) ; T2.3@370.865,163.271 C34.1@376.326,163.271 ; C34.1@376.453,163.398 377.85,163.398 379.044,164.592 379.044,173.177
  VCC w0.203: 352.939,206.584 352.958,206.604
  VCC w0.5: v3(331.825,213.919) 334.416,213.919 ; v3(331.847,218.419) 334.446,218.419 ; v3(331.851,209.169) 334.467,211.785 ; v3(331.851,225.019) 334.467,225.019 ; v3(331.876,212.446) 334.366,212.446 ; v3(331.876,223.52) 334.391,223.52 ; v3(331.876,226.517) 334.34,226.517 ; v2(335.102,195.275) 338.176,195.275 ; 336.461,229.629 v3(336.461,231.991) ; 337.961,229.503 v3(337.961,232.015) ; 342.461,229.521 v3(342.461,232.01) ; v3(346.461,205.263) 346.461,206.533 ; 349.25,229.514 v3(349.25,231.927) ; v3(350.461,205.275) 350.461,206.57 ; 352.095,229.514 v3(352.095,231.978) ; v1(352.939,205.443) 352.939,206.584 ; 353.847,229.489 355.727,231.369 v3(355.727,231.978) ; 355.092,228.295 v3(358.496,228.295) ; 355.905,213.284 v3(358.47,213.284) ; 355.921,214.919 v3(358.505,214.919) ; 355.93,210.236 v3(358.521,210.236) ; 355.956,225.019 v3(358.445,225.019) ; 355.996,220.919 v3(358.532,220.919) ; 356.133,223.545 v3(358.521,223.545) ; 367.309,177.825 v1(367.309,189.941) ; 369.504,220.462 v3(373.827,220.462) ; 369.595,209.88 v3(378.739,209.88) ; v3(392.338,214.462) 394.116,214.462 ; v3(392.504,224.462) 392.985,224.942 ; v3(392.557,216.637) 394.157,216.637 ; v3(392.557,217.475) 394.106,217.475 ; v3(392.559,219.962) 394.224,219.962 ; v3(392.615,220.962) 394.215,220.962 ; v3(392.633,213.512) 394.233,213.512 ; v3(392.659,222.301) 394.233,222.301
  VCC w1: v1(317.221,166.218) 324.79,173.787 v1(324.79,176.657) 324.79,177.952 325.831,178.994 323.52,178.994 ; P2.4@318.541,178.994 323.52,178.994 ; v2(323.52,182.194) 323.52,178.994 ; v2(325.907,182.27) 327.457,180.721 ; 334.467,211.785 334.467,225.019 334.467,227.635 336.321,229.489 353.847,229.489 355.879,227.457 355.879,208.686 353.797,206.604 352.958,206.604 339.573,206.604 v3(338.328,205.359) ; v3(379.181,229.199) 379.181,231.099 v2(382.727,234.645) ; v1(385.572,203.479) 391.363,197.688
  VCC w2: v5(321.488,207.264) 323.393,205.359 v3(338.328,205.359) 338.328,191.491 ; 325.831,178.994 338.328,191.491 ; v3@379.181,229.286 373.507,229.286 369.494,225.273 369.494,201.397 382.422,188.468 ; v2(380.094,175.108) 377.478,177.724 352.095,177.724 338.328,191.491 ; 382.422,175.666 382.422,188.468 ; v3(392.684,225.4) 394.233,223.85 394.233,222.301 394.233,213.512 394.233,200.279 ; v5(403.047,196.012) 398.78,200.279 394.233,200.279 ; 382.422,188.468 394.233,200.279
  Bottom Layer w0.203: v3(331.825,213.919) C121.2@332.613,213.919 ; v3(331.847,218.419) C119.2@332.685,218.419 ; v3(331.851,209.169) C125.2@332.588,209.169 ; v3(331.851,225.019) C115.2@332.689,225.019 ; v3(331.876,212.446) C123.2@332.562,212.446 ; v3(331.876,223.52) 332.664,223.52 C117.2@332.689,223.495 ; v3(331.876,226.517) C113.2@332.664,226.517 ; v3(335.461,205.305) C127.2@335.461,205.99 ; C130.2@336.321,231.191 336.461,231.331 v3(336.461,231.991) ; C128.2@337.961,231.307 v3(337.961,232.015) ; v3(338.328,205.359) C129.2@338.328,206.121 ; C126.2@342.417,231.191 342.461,231.235 v3(342.461,232.01) ; v3(346.461,205.263) C105.2@346.461,206.126 ; C112.2@349.021,231.191 349.25,231.419 v3(349.25,231.927) ; v3(350.461,205.275) C103.2@350.461,206.062 ; C110.2@352.095,231.216 v3(352.095,231.978) ; v1(352.939,205.443) C124.2@352.939,206.205 ; C106.2@355.727,231.292 v3(355.727,231.978) ; C108.2@357.734,225.019 v3(358.445,225.019) ; C104.2@357.734,228.067 357.962,228.295 v3(358.496,228.295) ; C116.2@357.77,220.919 v3(358.532,220.919) ; C122.2@357.784,210.236 v3(358.521,210.236) ; C120.2@357.784,213.284 v3(358.47,213.284) ; C114.2@357.784,223.545 v3(358.521,223.545) ; C118.2@357.794,214.919 v3(358.505,214.919) ; C68.1@378.689,230.073 379.181,229.58 v3(379.181,229.199) ; v3(392.338,214.462) 393.328,214.462 C67.1@393.725,214.859 ; v3(392.504,224.462) 393.266,224.462 C57.1@393.725,224.003 ; v3(392.557,216.637) C66.1@393.471,216.637 ; v3(392.557,217.475) 393.294,217.475 C64.1@393.725,217.907 ; v3(392.559,219.962) 393.194,219.962 C61.1@393.725,219.431 ; v3(392.615,220.962) C59.1@393.718,220.962 ; v3(392.633,213.512) C107.2@393.548,213.512 ; v3(392.659,222.301) 393.548,222.301 C58.1@393.725,222.479 ; v3(392.684,225.4) C56.1@393.598,225.4 ; P10.30@412.62,167.31 412.62,168.221 414.172,169.774 v1(414.172,175.336) ; P5.4@437.693,154.102 R58.1@437.693,164.262
  Bottom Layer w0.5: v3(373.827,220.462) 374.858,219.431 C60.2@375.234,219.431 C63.2@377.215,219.431 ; C109.2@378.739,208.737 v3(378.739,209.88) ; v1(416.103,194.742) 418.338,196.977 428.93,196.977 428.93,202.082 432.029,205.181 L21.1@434.34,205.181 ; 428.93,198.73 435.61,198.73 L20.1@437.769,196.571
  Bottom Layer w1: R61.2@391.338,169.748 v1(393.37,169.748) ; v2(418.033,180.086) v2(418.033,178.689) 426.364,170.358 433.273,170.358 ; L19.1@437.413,182.448 436.245,181.28 L17.1@434.772,181.28 434.772,176.911 433.273,175.412 433.273,170.358 ; R58.1@437.642,164.313 437.642,165.989 433.273,170.358
  other v2: 378.02,170.739 380.043,170.739 378.045,172.898 380.069,172.898 382.092,172.898 378.071,175.108 382.118,175.108
VCC3_3_TCXO: C1.2 C3.1 L2.1 L18.2 | length 7.4
  Top Layer w0.254: L2.1@360.223,185.115 364.236,185.115 C1.2@365.227,186.106 365.252,186.131 L18.2@367.208,186.131
VOUT3_3_4360: L12.2 L13.2 L21.2 | length 5
  Bottom Layer w0.203: L13.2@433.146,200.508 434.34,200.508
  Bottom Layer w1: L21.2@434.34,202.895 434.34,200.508 L12.2@435.737,200.508